# Altium PCB Digital_Encoder_Layout.PcbDoc
Units mil, origin at the board's own origin, x right, y up, seen from the top; angles counter-clockwise.
Board outline 1220.47 x 1233.89 mil, 2 copper layers (Top Layer, Bottom Layer); 7 components, 9 nets, 33 pads, 0 vias.
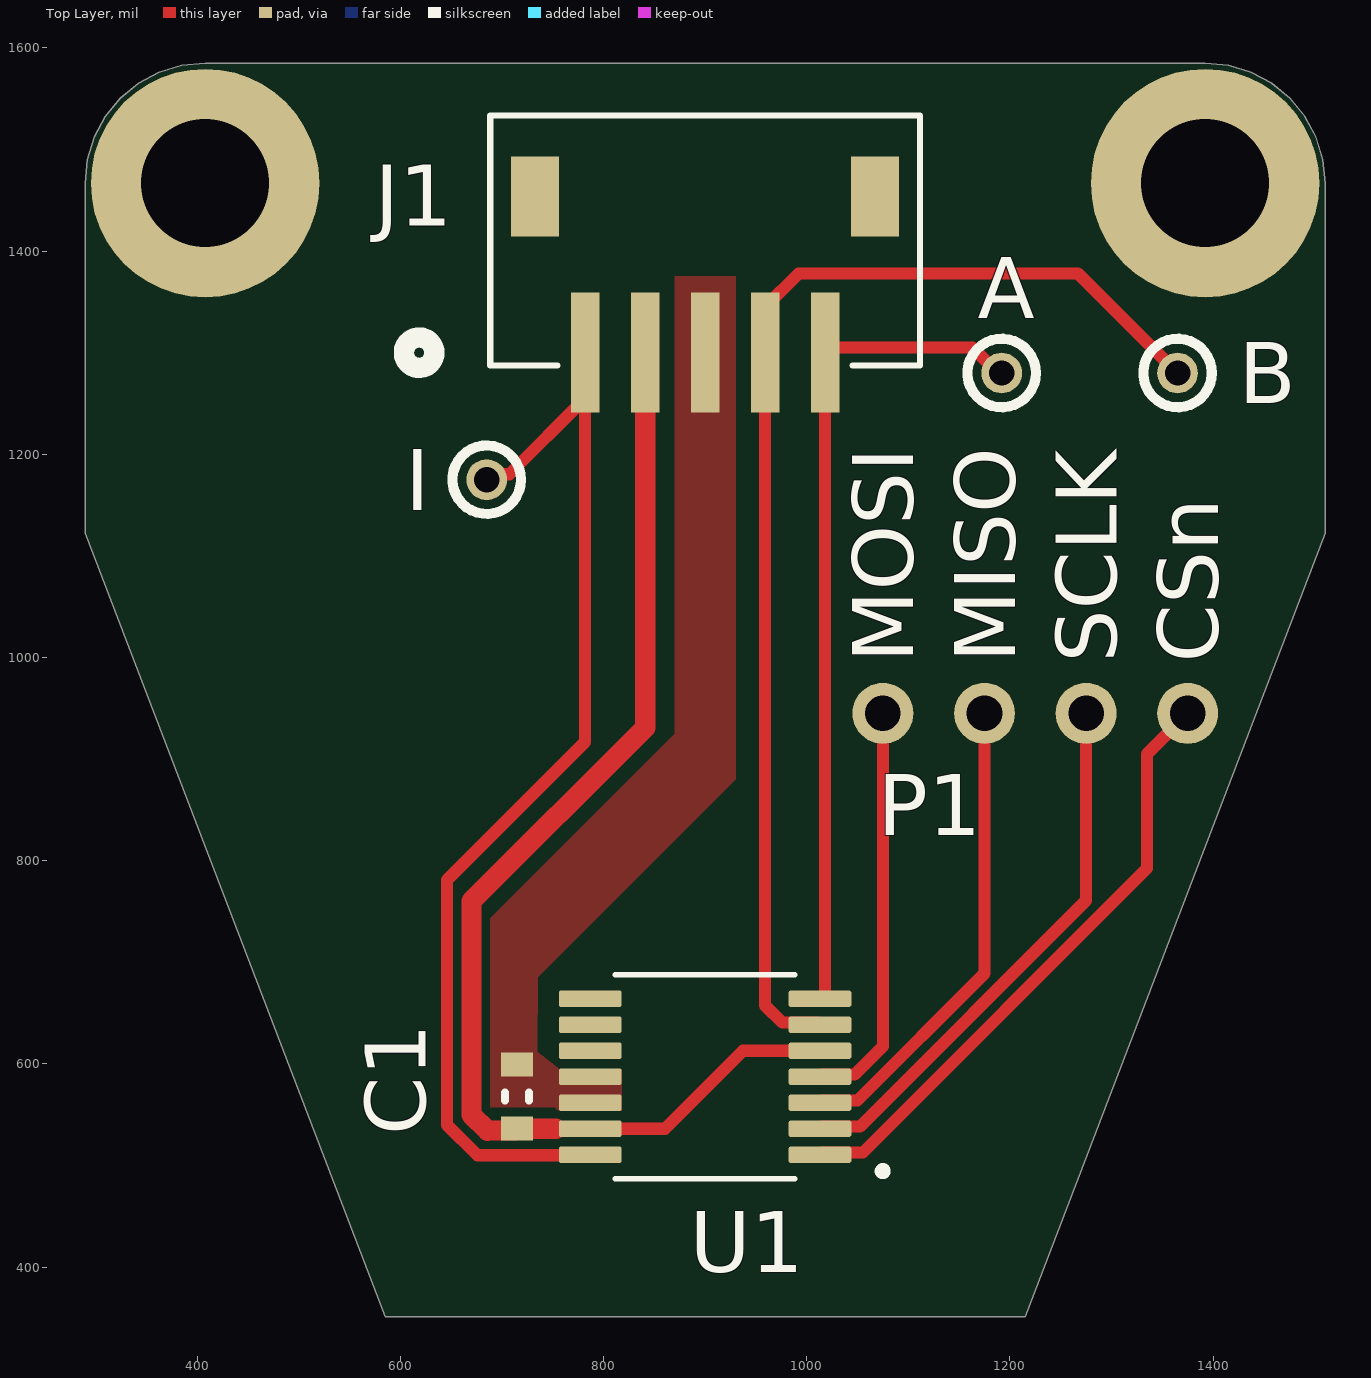
[diagram p0: Top Layer view]
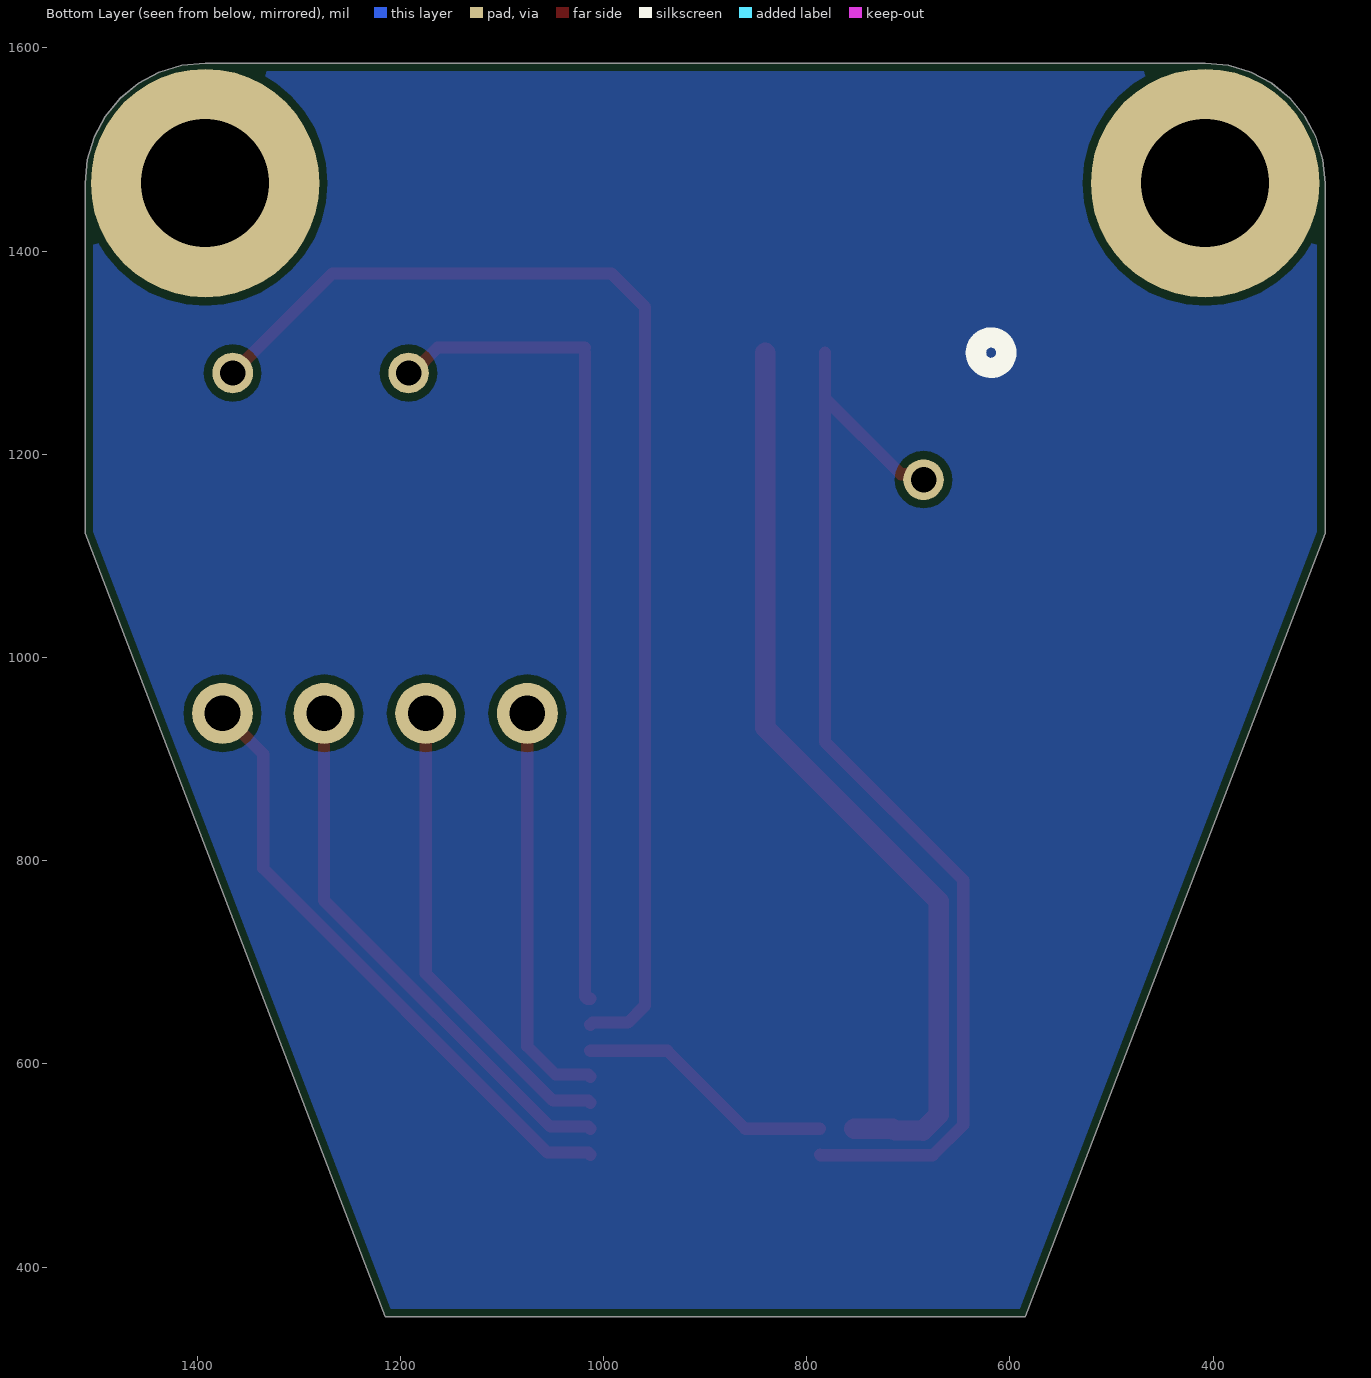
[diagram p1: Bottom Layer view, seen from below]

## Layer stack, top to bottom
Top Solder: solder mask 0.4, Solder Resist, Dk 3.5
Top Layer: signal copper 1.4
Dielectric 1: dielectric 12.6, FR-4, Dk 4.8
Bottom Layer: signal copper 1.4
Bottom Solder: solder mask 0.4, Solder Resist, Dk 3.5

## Board outline
407.87,1585 384.83,1582.73 362.68,1576.01 342.26,1565.09 324.36,1550.41 309.67,1532.51 298.75,1512.09 292.03,1489.93 289.76,1466.89 289.76,1122.31 585.04,351.11 1214.96,351.11 1510.24,1122.31 1510.24,1466.89 1507.97,1489.93 1501.25,1512.09 1490.33,1532.51 1475.64,1550.41 1457.74,1565.09 1437.32,1576.01 1415.17,1582.73 1392.13,1585

## Design rules (kind name [scope] priority, off if disabled: settings)
BoardOutlineClearance [All] p1: gap=7.87 ignorepadtopadclearanceinfootprint=FALSE except(15.75: Arc-SplitBarrior Arc-SplitContinuation Track-SplitBarrior Track-SplitContinuation SMDPad-SplitBarrior SMDPad-SplitContinuation THPad-SplitBarrior THPad-SplitContinuation Via-SplitBarrior Via-SplitContinuation Fill-SplitBarrior Fill-SplitContinuation Poly-SplitBarrior Poly-SplitContinuation Region-SplitBarrior Region-SplitContinuation Text-SplitBarrior Text-SplitContinuation)
Clearance "Clearance Bottom Layer" [OnLayer('Bottom Layer')] p1: gap=8 ignorepadtopadclearanceinfootprint=TRUE except(10: Arc-Text Track-Text SMDPad-Text THPad-Text Via-Text Fill-Text Poly-Text Region-Text Text-Text)
Clearance "Clearance Top Layer" [OnLayer('Top Layer')] p2: gap=8 ignorepadtopadclearanceinfootprint=TRUE except(10: Arc-Text Track-Text SMDPad-Text THPad-Text Via-Text Fill-Text Poly-Text Region-Text Text-Text)
Clearance [All] p3: gap=7.87 ignorepadtopadclearanceinfootprint=FALSE except(3.5: Arc-Arc Arc-Track Arc-SMDPad Track-Track Track-SMDPad SMDPad-SMDPad; 5: Arc-Via Track-Via SMDPad-Via THPad-Via Via-Via; 10: Arc-Text Track-Text SMDPad-Text THPad-Text Via-Text Fill-Text Poly-Text Region-Text Text-Text)
HoleSize [All] p1: absolutevalues=TRUE maxlimit=248.03 minlimit=7.87 maxpercent=80.000 minpercent=20.000
MinimumAnnularRing [All] p1: minimumring=3
MinimumSolderMaskSliver [All] p1: minsoldermaskwidth=3.94
PolygonConnect [All vs IsNamedPolygon('3V3_L01_P002')] p1: thpad.connectstyle=Direct thpad.reliefconductorwidth=10 thpad.reliefentries=4 thpad.polygonreliefangle="90 Angle" thpad.airgapwidth=10 smdpad.connectstyle=Direct smdpad.reliefconductorwidth=10 smdpad.reliefentries=4 smdpad.polygonreliefangle="90 Angle" smdpad.airgapwidth=10 via.connectstyle=Relief via.reliefconductorwidth=10 via.reliefentries=4 via.polygonreliefangle="90 Angle" via.airgapwidth=10
PolygonConnect PolygonConnect_1 [All] p2: thpad.connectstyle=Relief thpad.reliefconductorwidth=20 thpad.reliefentries=4 thpad.polygonreliefangle="90 Angle" thpad.airgapwidth=10 smdpad.connectstyle=Relief smdpad.reliefconductorwidth=20 smdpad.reliefentries=4 smdpad.polygonreliefangle="90 Angle" smdpad.airgapwidth=10 via.connectstyle=Direct via.reliefconductorwidth=20 via.reliefentries=4 via.polygonreliefangle="90 Angle" via.airgapwidth=10
RoomDefinition Digital_Encoder_Breakout [InComponentClass('Digital_Encoder_Breakout')] p1: confinementstyle=ConfineIn formatcopy=TRUE lockcomponents=FALSE outline 0,0 2000,0 2000,1960 0,1960
RoutingCorners [All] p1: cornerstyle=Round minsetback=100 maxsetback=100
RoutingVias [All] p1: holewidth=19.68 width=39.37 viastyle="Through Hole" minholewidth=7.87 minwidth=17.72 maxholewidth=39.37 maxwidth=78.74
SilkToSilkClearance [All] p1: silktosilkclearance=3.94
SilkToSolderMaskClearance [IsPad] p1: minsilkscreentomaskgap=3.94 clearancetoexposedcopper=TRUE
SolderMaskExpansion [All] p1: expansion=4 istentingtop=FALSE
Width [All] p1: maxlimit=100 minlimit=3.5 preferedwidth=15
25 further rules are at their usual default settings.

## Components (designator, comment, footprint, x,y, rotation, side; value= is the part's Value field where it differs from the comment)
A "Test Point (Via)" TP 1191.87,1280 r0 top
B "Test Point (Via)" TP 1365,1280 r90 top
C1 "0.10uF" 0603 715,567.79 r270 top
I "Test Point (Via)" TP 685,1175 r90 top
J1 "S5B-ZR-SM4A-TF (LF) (SN)" CONN_S5B-ZR-SM4A-TF_JST 781.89,1300 r0 top
P1 "POGO 4 PIN THRU" "POGO 4 PIN THRU" 1375,945 r180 top
U1 "AS5047U" AS5047U 900,587.33 r180 top

## Footprints (in the part's own frame and the unit in brackets; to place one, negate y for a bottom-side part, rotate by r counter-clockwise, add the part's x,y. Pads: shape width x height; smd on the part's side, far side on the other; paste and mask are expansions set on the pad)
0603 [mm] "Chip Resistor, 2-Leads, Body 1.60x0.80mm, IPC High Density"
  rect 0.6x0.8 smd: 1(-0.8,0) 2(0.8,0)
  silkscreen extent -0.1,-0.3 0.1,0.3, body extent -0.8,-0.4 0.8,0.4, height 0.6
AS5047U [mm]
  rrect25% 1.57x0.41 smd: 1(-2.87,1.95) 2(-2.87,1.3) 3(-2.87,0.65) 4(-2.87,0) 5(-2.87,-0.65) 6(-2.87,-1.3) 7(-2.87,-1.95) 8(2.87,-1.95) 9(2.87,-1.3) 10(2.87,-0.65) 11(2.87,0) 12(2.87,0.65) 13(2.87,1.3) 14(2.87,1.95)
  silkscreen extent -4.54,-2.55 2.25,2.55
CONN_S5B-ZR-SM4A-TF_JST [mil]
  rect 28x118 smd paste+0 mask+0: 1(0,0) 2(59.06,0) 3(118.11,0) 4(177.17,0) 5(236.22,0)
  rect 47x79 smd: 6(-49.21,153.62) 7(285.43,153.62)
  silkscreen extent -178,-15 330,233, body extent 0,0 10,10, height 10
"POGO 4 PIN THRU" [mil]
  round 60 hole 35.04: 1(0,0) 2(100,0) 3(200,0) 4(300,0)
TP [mil] "Test point (40mil Standard)"
  round 40 hole 25: 1(0,0)

## Part data
C1: library part "CAP 0.10uF 16V", "CAP CER 0.10UF 16V X5R 0603/0805", Operating Temperature="-55°C ~ 85°C", Package=0603/0805, Rating=16V, Temperature Coefficient=X5R, Tolerance=10%
J1: library part "CN 4POS JST ZH", "Connector Header Surface Mount, Right Angle 5 position 0.059\" (1.50mm)", Mfr_Name=JST, Supplier Part Number 1=455-1696-1-ND, Copyright="Copyright (C) 2021 Ultra Librarian. All rights reserved.", Digi-Key_Part_Number_1=455-1696-2-ND, Digi-Key_Part_Number_2=455-1696-1-ND, Digi-Key_Part_Number_3=455-1696-6-ND, Manufacturer_Part_Number="S5B-ZR-SM4A-TF (LF) (SN)", RefDes=RefDes, Supplier 1=Digi-Key, Type=DEV
P1: "4 pin POGO Holes 0.100\" Pitch", ComponentLink1Description="POGO Pins", ComponentLink1URL=https://www.digikey.ca/en/products/detail/mill-max-manufacturing-corp/816-22-004-10-001101/6149707?utm_adgroup=Rectangular%20Connectors%20-%20Spring%20Loaded&utm_source=google&utm_medium=cpc&utm_campaign=Shopping_Product_Connectors%2C%20Interconnects&utm_term=&productid=6149707&gclid=CjwKCAjwyIKJBhBPEiwAu7zllx5RKB49Aiz1Tcq0lCLtxeAJbHB79ZaevgMe56kl4rzAjPwbrhvRoBoC1QsQAvD_BwE
U1: "14-Bit On-Axis Magnetic Rotary Position Sensor with Up to 14-Bit Binary Incremental Pulse Count", Supplier Part Number 1=AS5047D-ATSMCT-ND, Supplier 1=Digi-Key

## Free pads (board coordinates)
  round 225 hole 125.98: 1(407.87,1466.89) 1(1392.13,1466.89)
  round 225 / inner round 60 / far side round 60 hole 125.98: 5(407.87,1466.89)

## Nets (pads, with @x,y where several pads share a name; then routed paths per layer and width w, separated by ;. In a path a pad name is that pad's centre, name@x,y a point inside that pad or via, vN(x,y) a via of type N, cw(c..) or ccw(c..) an arc to the next point about the centre after c; other vN are vias at no path point)
3V3: C1.1 J1.3 U1.11 U1.12
A: A.1 J1.5 U1.7 | length 823.9
  Top Layer w12: U1.7 1016.04,664.1 1018.11,666.17 J1.5 ; J1.5@1018.11,1305 1163.13,1305 1188.13,1280 A.1
B: B.1 J1.4 U1.6 | length 1209.5
  Top Layer w12: U1.6 1010.92,640.58 976.04,640.58 959.06,657.57 J1.4 959.06,1345 992.06,1378 1267,1378 B.1
CSn: P1.1 U1.1 | length 607.9
  Top Layer w12: U1.1 1015.06,512.63 1055.15,512.63 1335,792.48 1335,905 P1.1
GND: C1.2 J1.2 U1.5 U1.13 | length 1169.4
  Top Layer w12: U1.13 860.58,536.15 937.35,612.92 U1.5
  Top Layer w20: 753.14,536.3 C1.2 713.19,534.49 686.31,534.49 685.82,534 670,549.82 670,760 840.94,930.94 J1.2
I: I.1 J1.1 U1.14 | length 1100
  Top Layer w12: I.1 690.36,1180.36 707.25,1180.36 J1.1@781.89,1255 ; J1.1 J1.1@781.89,1255 ; U1.14 786.45,510 675.88,510 646,539.88 646,781 781.89,916.89 J1.1@781.89,1255
MISO: P1.3 U1.3 | length 470.7
  Top Layer w12: U1.3 1015.06,563.81 1049.76,563.81 1175,689.05 P1.3
MOSI: P1.4 U1.4 | length 402.1
  Top Layer w12: U1.4 1015.06,589.4 1047.07,589.4 1075,617.34 P1.4
SCLK: P1.2 U1.2 | length 539.3
  Top Layer w12: U1.2 1015.06,538.22 1052.45,538.22 1275,760.77 P1.2
pads on no net: J1.6 J1.7 U1.8 U1.9 U1.10

## Polygon pours and split planes (outlines as drawn)
no net on Bottom Layer "NONET_L02_P001" (solid, pour order 1): 0,1695 0,155 2280,155 2280,1725
3V3 on Top Layer "3V3_L01_P002" (solid, pour order 2): 870,1375 930,1375 930,880 735.42,685.42 734.73,612 756.69,594.81 817.91,594.81 817.91,553.67 755.68,553.67 751.91,557.43 686.31,557.43 686.31,741.31 870,925

## Silkscreen, mask and mechanical layers (free items; w line width, h text height)
Top Overlay:
  circle w10: c685,1175 r33.7
  circle w10: c1191.87,1280 r33.7
  circle w10: c1365,1280 r33.7
  text "MOSI" at 1105,995 h60 r90
  text "MISO" at 1205,995 h60 r90
  text "SCLK" at 1305,995 h60 r90
  text "CSn" at 1405,995 h60 r90
Mechanical 1:
  the board outline again, w10

## Dimensions
1067.32,1453.62 to 1392.13,1466.89 on Dimensions
407.87,1466.89 to 732.68,1453.62 on Dimensions
407.87,1466.89 to 1392.13,1466.89 on Dimensions
1392.13,1466.89 to 900,587.33 on Dimensions